# Altium PCB pcb.PcbDoc (part 1 of 2)
Units mm, origin at the board's own origin, x right, y up, seen from the top; angles counter-clockwise.
Board outline 78.1 x 58.42 mm, 2 copper layers (Top Layer, Bottom Layer); 90 components, 71 nets, 303 pads, 67 vias.
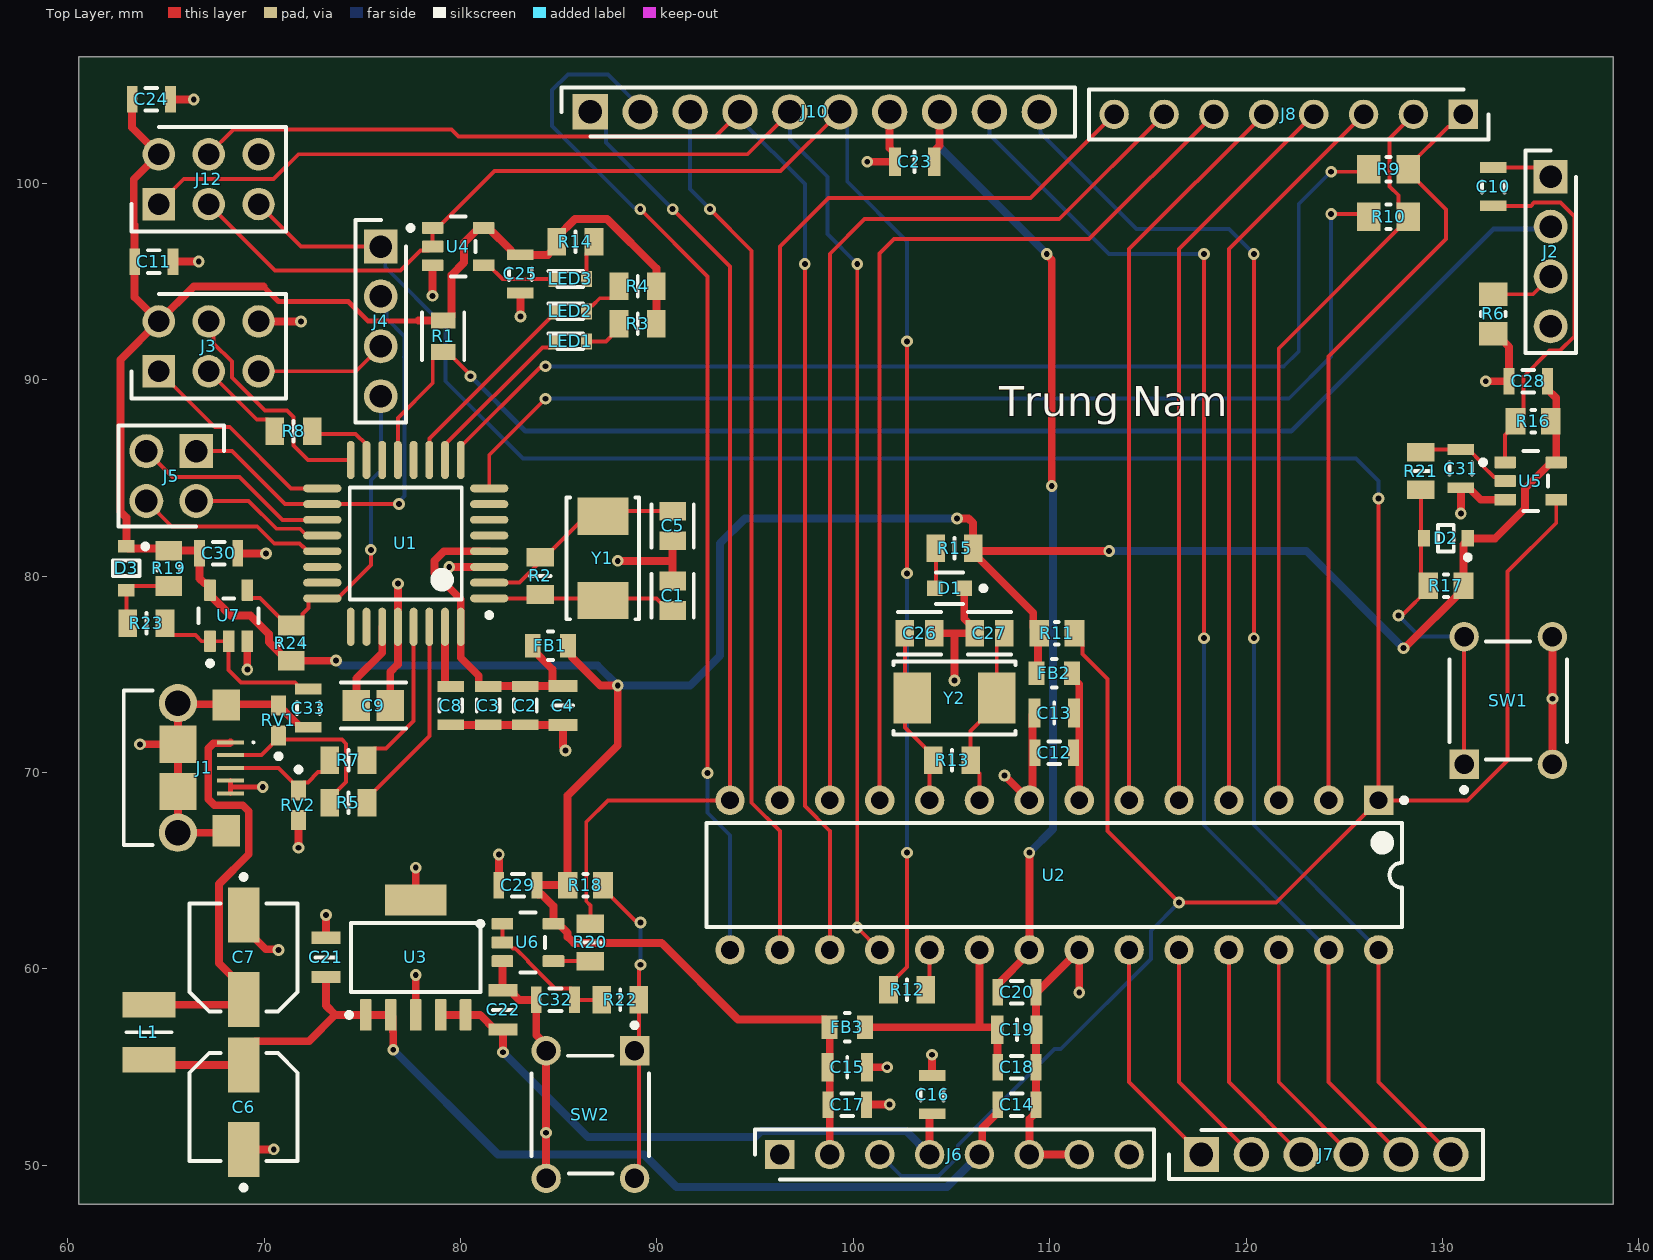
[diagram p0: Top Layer view]
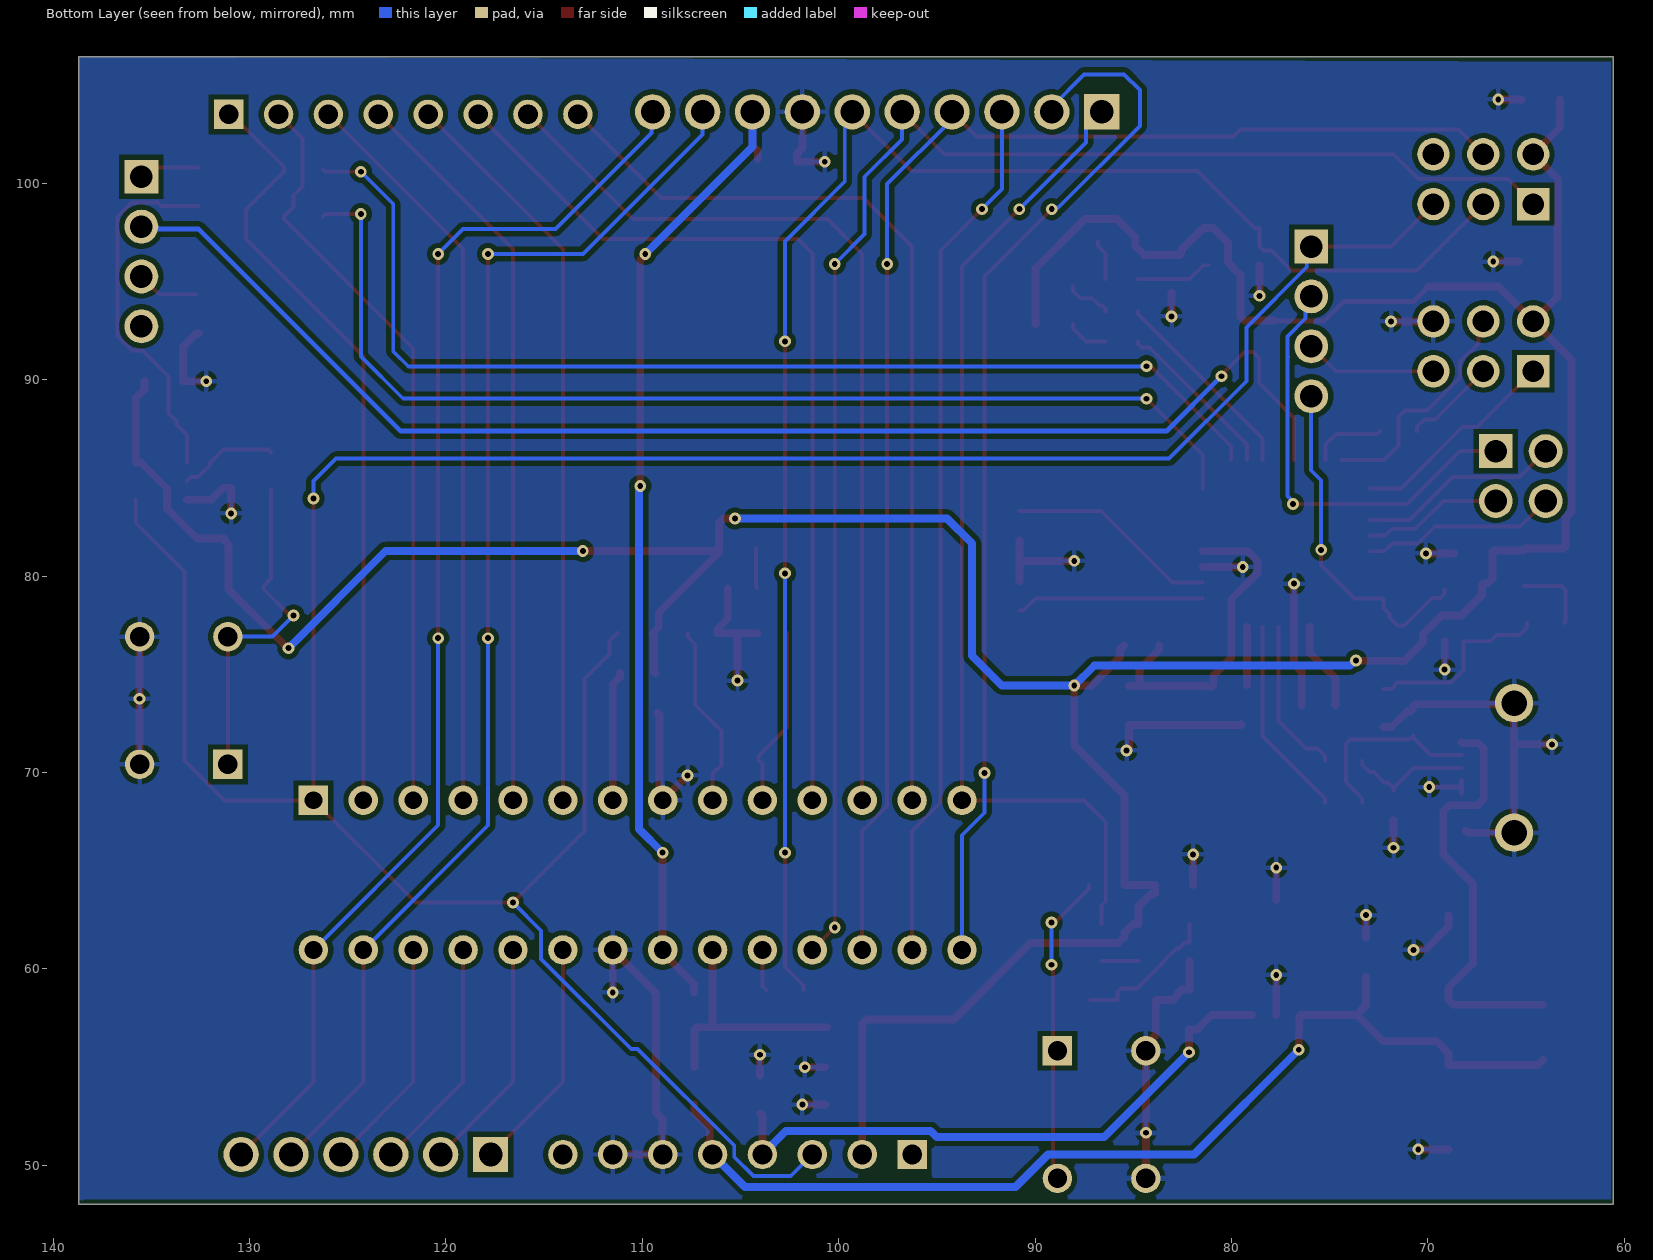
[diagram p1: Bottom Layer view, seen from below]
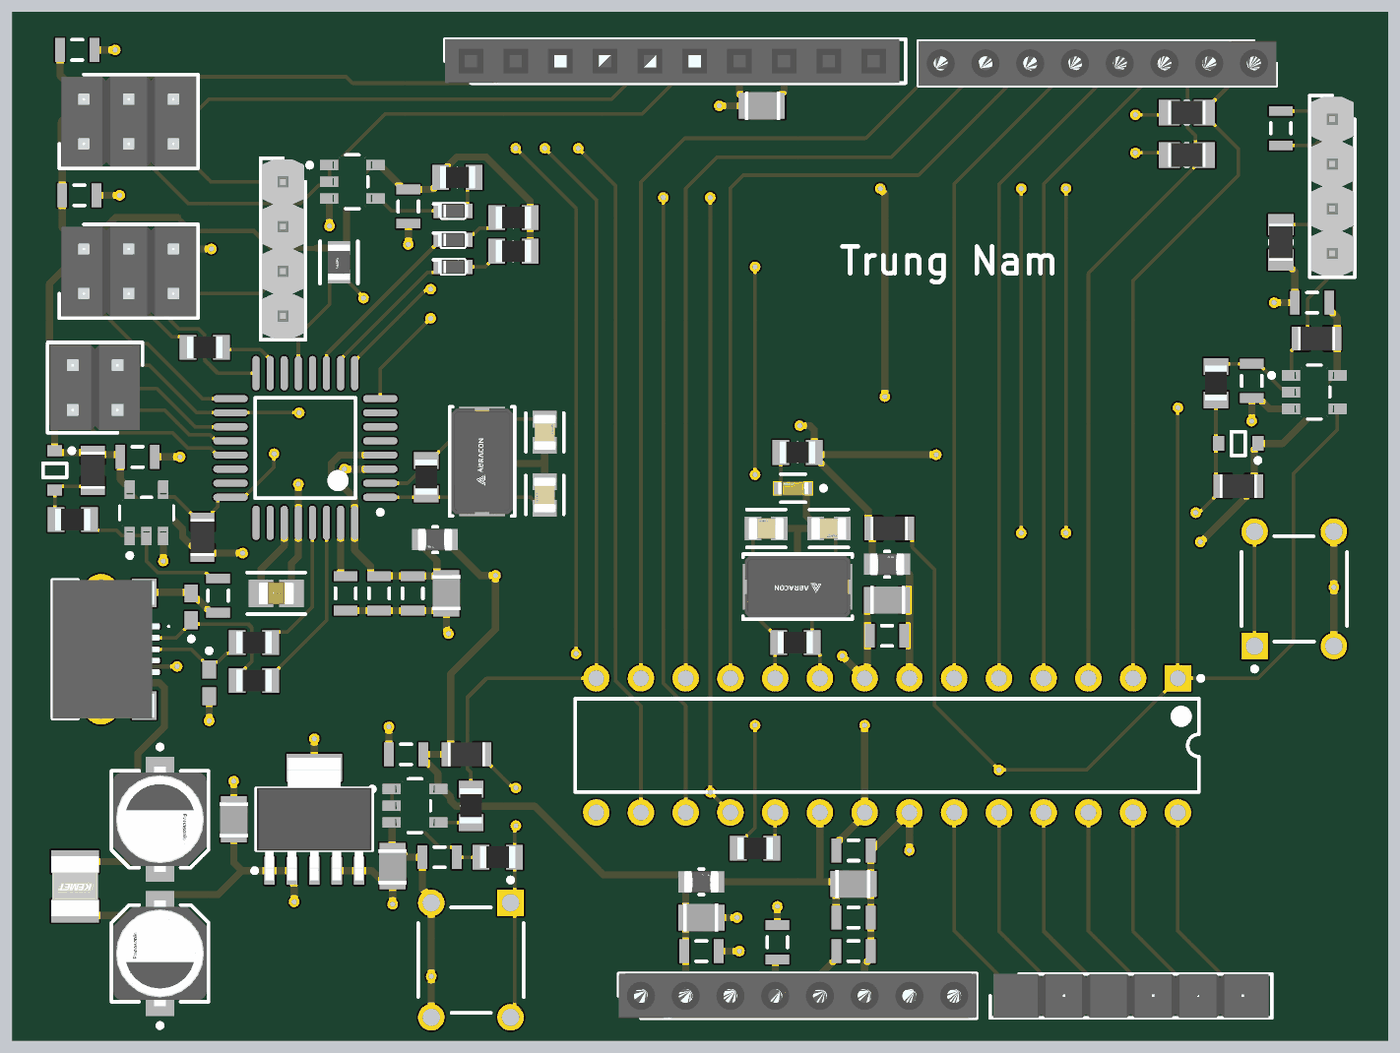
[diagram p2: 3D render of the assembled board from above, using the file's embedded part models]

## Layer stack, top to bottom
Top Solder: solder mask 0.0102, Solder Resist, Dk 3.5
Top Layer: signal copper 0.0356
Dielectric 1: dielectric 0.32, FR-4, Dk 4.8
Bottom Layer: signal copper 0.0356
Bottom Solder: solder mask 0.0102, Solder Resist, Dk 3.5

## Board outline
60.579,48.006 60.579,106.426 138.684,106.426 138.684,48.006

## Design rules (kind name [scope] priority, off if disabled: settings)
Clearance [All] p1: gap=0.254 ignorepadtopadclearanceinfootprint=FALSE
MinimumSolderMaskSliver [All] p1: minsoldermaskwidth=0.196
PolygonConnect [All] p1: connectstyle=Relief reliefconductorwidth=0.254 reliefentries=4 polygonreliefangle="90 Angle" airgapwidth=0.254
RoutingVias [All] p1: holewidth=0.2 width=0.4 viastyle="Through Hole" minholewidth=0.3 minwidth=0.6 maxholewidth=0.3 maxwidth=0.6
SilkToSolderMaskClearance [IsPad] p1: minsilkscreentomaskgap=0.2 clearancetoexposedcopper=TRUE
SolderMaskExpansion [All] p1: expansion=0.102 istentingtop=FALSE
SupplyNets "Schematic Supply Nets_5" [InNet('+5V/3V3')] p1: voltage=0.000
SupplyNets "Schematic Supply Nets_4" [InNet('+AREF')] p2: voltage=0.000
SupplyNets "Schematic Supply Nets_3" [InNet('GND')] p3: voltage=0.000
SupplyNets "Schematic Supply Nets_2" [InNet('+5')] p4: voltage=0.000
SupplyNets "Schematic Supply Nets_1" [InNet('+5V')] p5: voltage=0.000
SupplyNets "Schematic Supply Nets" [InNet('+3V3')] p6: voltage=0.000
Width [All] p1: maxlimit=0.4 minlimit=0.2 preferedwidth=0.254
28 further rules are at their usual default settings.

## Components (designator, comment, footprint, x,y, rotation, side; value= is the part's Value field where it differs from the comment)
C1 "18p" FP-C0805C-DN-MFG 90.805,78.994 r90 top value="18 pF"
C2 "100n" CAPC2013X145X20LL20 83.312,73.406 r90 top
C3 "100n" CAPC2013X145X20LL20 81.407,73.406 r90 top
C4 "10uF/16V" CAPC2012X145N 85.217,73.406 r90 top
C5 "18p" FP-C0805C-DN-MFG 90.805,82.55 r270 top value="18 pF"
C6 "100u/10V" FP-SC-MFG 68.961,52.959 r90 top
C7 "100u/10V" FP-SC-MFG 68.961,60.579 r270 top
C8 "100n" CAPC2013X145X20LL20 79.502,73.406 r90 top
C9 "1u" FP-C2012-125-0_2-IPC_A 75.565,73.406 r0 top
C10 "100n" CAPC2013X145X20LL20 132.588,99.822 r270 top
C11 "100n" CAPC2013X145X20LL20 64.389,96.012 r180 top
C12 "100n" CAPC2013X145X20LL20 110.236,70.993 r0 top
C13 "10uF/16V" CAPC2012X145N 110.236,73.025 r0 top
C14 "100n" CAPC2013X145X20LL20 108.331,53.086 r180 top
C15 "10uF/16V" CAPC2012X145N 99.695,54.991 r180 top
C16 "100n" CAPC2013X145X20LL20 104.013,53.594 r270 top
C17 "100n" CAPC2013X145X20LL20 99.695,53.086 r180 top
C18 "100n" CAPC2013X145X20LL20 108.331,54.991 r180 top
C19 "10uF/16V" CAPC2012X145N 108.331,56.896 r180 top
C20 "100n" CAPC2013X145X20LL20 108.331,58.801 r180 top
C21 "10uF/16V" CAPC2012X145N 73.152,60.579 r270 top
C22 "10uF/16V" CAPC2012X145N 82.169,57.912 r270 top
C23 "10uF/16V" CAPC2012X145N 103.124,101.092 r0 top
C24 "100n" CAPC2013X145X20LL20 64.262,104.267 r180 top
C25 "100n" CAPC2013X145X20LL20 83.058,95.377 r90 top
C26 "18p" FP-C0805C-DN-MFG 103.378,77.089 r0 top value="18 pF"
C27 "18p" FP-C0805C-DN-MFG 106.934,77.089 r180 top value="18 pF"
C28 "100n" CAPC2013X145X20LL20 134.366,89.916 r0 top
C29 "100n" CAPC2013X145X20LL20 82.931,64.262 r0 top
C30 "100n" CAPC2013X145X20LL20 67.691,81.153 r180 top
C31 "100n" CAPC2013X145X20LL20 130.937,85.471 r90 top
C32 "100n" CAPC2013X145X20LL20 84.836,58.42 r0 top
C33 "100n" CAPC2013X145X20LL20 72.263,73.279 r90 top
D1 "Green" FP-LG_L29K-MFG 104.902,79.375 r180 top
D2 "BAT54HT1G" ONSC-SOD-323-2-477-02_V 130.175,81.915 r180 top
D3 "BAT54HT1G" ONSC-SOD-323-2-477-02_V 62.992,80.391 r270 top
FB1 "MPZ2012S601AT000" FP-MPZ2012-MFG 84.582,76.454 r180 top
FB2 "MPZ2012S601AT000" FP-MPZ2012-MFG 110.236,75.057 r0 top
FB3 "MPZ2012S601AT000" FP-MPZ2012-MFG 99.695,57.023 r0 top
J1 "10118193-0001LF" 101181930001LF 65.913,70.231 r270 top
J2 "68001-204HLF" HDRV4W67P0X254_1X4_1016X241X858P 135.509,100.33 r270 top
J3 "A2541WV-2x3P-C808D808-G15" HDRV6W64P254_2X3_762X508X533P 64.643,90.424 r0 top
J4 "68001-204HLF" HDRV4W67P0X254_1X4_1016X241X858P 75.946,96.774 r270 top
J5 "68602-204HLF" HDRV4W67P254_2X2_508X483X888P 66.548,86.36 r180 top
J6 "M20-7820842" RHDR8W80P0X254_1X8_2032X254X850P 96.266,50.546 r0 top
J7 "M20-7820646" HDRV6W70P0X254_1X6_1564X250X865P 117.729,50.546 r0 top
J8 "M20-7820842" RHDR8W80P0X254_1X8_2032X254X850P 131.064,103.505 r180 top
J10 "M20-7821046" RHDR10W70P0X254_1X10_2580X250X865P 86.614,103.632 r0 top
J12 "A2541WV-2x3P-C808D808-G15" HDRV6W64P254_2X3_762X508X533P 64.643,98.933 r0 top
L1 "2u2/2A" INDC3225X270N 64.135,56.769 r90 top
LED1 "Orange" SODFL1708X67N 85.598,91.948 r0 top
LED2 "Orange" SODFL1708X67N 85.598,93.472 r0 top
LED3 "Orange" SODFL1708X67N 85.598,95.123 r0 top
R1 "100k" FP-RC0805-0_6-IPC_C 79.121,92.202 r90 top
R2 "1M" RESC2012X60N 84.074,80.01 r90 top
R3 "560R" RESC2012X60N 89.027,92.837 r0 top
R4 "560R" RESC2012X60N 89.027,94.742 r0 top
R5 "22R" RESC2012X60N 74.295,68.453 r0 top
R6 "1k" RESC2013X60X35ML10T20 132.588,93.345 r270 top
R7 "22R" RESC2012X60N 74.295,70.612 r0 top
R8 "22R" RESC2012X60N 71.501,87.376 r180 top
R9 "1k" RESC2013X60X35ML10T20 127.254,100.711 r180 top
R10 "1k" RESC2013X60X35ML10T20 127.254,98.298 r180 top
R11 "10k" RESC2013X60X35NL10T20 110.363,77.089 r180 top
R12 "22R" RESC2012X60N 102.743,58.928 r180 top
R13 "1M" RESC2012X60N 105.029,70.612 r180 top
R14 "560R" RESC2012X60N 85.852,97.028 r180 top
R15 "560R" RESC2012X60N 105.156,81.407 r0 top
R16 "10K" RESC2013X60X35NL10T20 134.62,87.884 r0 top
R17 "10K" RESC2013X60X35NL10T20 130.175,79.502 r0 top
R18 "10K" RESC2013X60X35NL10T20 86.36,64.262 r180 top
R19 "10K" RESC2013X60X35NL10T20 65.151,80.391 r90 top
R20 "560R" RESC2012X60N 86.614,61.341 r270 top
R21 "22R" RESC2012X60N 128.905,85.344 r90 top
R22 "22R" RESC2012X60N 88.138,58.42 r180 top
R23 "22R" RESC2012X60N 64.008,77.597 r0 top
R24 "10K" RESC2013X60X35NL10T20 71.374,76.581 r270 top
RV1 "CG0603MLC-05E" BOUR-CG0603-2_V 70.739,72.644 r90 top
RV2 "CG0603MLC-05E" BOUR-CG0603-2_V 71.755,68.326 r270 top
SW1 "1825910-6" TECO-1825910-6_V 133.35,73.66 r90 top
SW2 "1825910-6" TECO-1825910-6_V 86.614,52.578 r270 top
U1 "ATmega16U2-AU" 32A_M 77.216,81.661 r180 top
U2 "ATmega328P-PU" 28P3 110.236,64.77 r270 top
U3 "TL1963A-33DCQR" DCQ0006A_L 77.724,60.579 r90 top
U4 "SN74AHC1G09DBVR" FP-DBV0005A-MFG 79.883,96.774 r0 top
U5 "SN74AHC1G09DBVR" FP-DBV0005A-MFG 134.493,84.836 r0 top
U6 "SN74AHC1G09DBVR" FP-DBV0005A-MFG 83.439,61.341 r0 top
U7 "SN74AHC1G09DBVR" FP-DBV0005A-MFG 68.199,77.978 r90 top
Y1 "ABM7-16.000MHZ-D2Y-T" FP-ABM7-MFG 87.249,80.899 r90 top
Y2 "ABM7-16.000MHZ-D2Y-T" FP-ABM7-MFG 105.156,73.787 r180 top

## Footprints (in the part's own frame and the unit in brackets; to place one, negate y for a bottom-side part, rotate by r counter-clockwise, add the part's x,y. Pads: shape width x height; smd on the part's side, far side on the other; paste and mask are expansions set on the pad)
28P3 [mm] "28-Pin Plastic Dual In-Line Package (PDIP)"
  rect 1.5x1.5 hole 0.9: 1(-3.81,16.51)
  round 1.5 hole 0.9: 2(-3.81,13.97) 3(-3.81,11.43) 4(-3.81,8.89) 5(-3.81,6.35) 6(-3.81,3.81) 7(-3.81,1.27) 8(-3.81,-1.27) 9(-3.81,-3.81) 10(-3.81,-6.35) 11(-3.81,-8.89) 12(-3.81,-11.43) 13(-3.81,-13.97) 14(-3.81,-16.51) 15(3.81,-16.51) 16(3.81,-13.97) 17(3.81,-11.43) 18(3.81,-8.89) 19(3.81,-6.35) 20(3.81,-3.81) 21(3.81,-1.27) 22(3.81,1.27) 23(3.81,3.81) 24(3.81,6.35) 25(3.81,8.89) 26(3.81,11.43) 27(3.81,13.97) 28(3.81,16.51)
  silkscreen extent -3.93,-17.7 2.65,17.94, body extent -3.6,-17.65 3.6,17.65, height 4.58
32A_M [mm] "Thin QFP, 32-Leads, Body 7x7mm, Pitch 0.8mm, IPC Low Density"
  oval 1.95x0.4 smd: 1(-4.25,2.8) 2(-4.25,2) 3(-4.25,1.2) 4(-4.25,0.4) 5(-4.25,-0.4) 6(-4.25,-1.2) 7(-4.25,-2) 8(-4.25,-2.8) 17(4.25,-2.8) 18(4.25,-2) 19(4.25,-1.2) 20(4.25,-0.4) 21(4.25,0.4) 22(4.25,1.2) 23(4.25,2) 24(4.25,2.8)
  oval 0.4x1.95 smd: 9(-2.8,-4.25) 10(-2,-4.25) 11(-1.2,-4.25) 12(-0.4,-4.25) 13(0.4,-4.25) 14(1.2,-4.25) 15(2,-4.25) 16(2.8,-4.25) 25(2.8,4.25) 26(2,4.25) 27(1.2,4.25) 28(0.4,4.25) 29(-0.4,4.25) 30(-1.2,4.25) 31(-2,4.25) 32(-2.8,4.25)
  silkscreen extent -4.38,-2.85 2.85,3.77, body extent -3.5,-3.5 3.5,3.5, height 1.2
101181930001LF [mm]
  rect 0.2x1.35 smd: 1(-1.3,2.38) 2(-0.65,2.38) 3(0,2.38) 4(0.65,2.38) 5(1.3,2.38)
  round 1.95 hole 1.3: MH1(-3.3,-0.295) MH2(3.3,-0.295)
  rect 1.6x1.4 smd: MP1(-3.2,2.155) MP2(3.2,2.155)
  rect 1.9x1.9 smd: MP3(-1.2,-0.295) MP4(1.2,-0.295)
  silkscreen extent -3.93,-3.06 3.93,3.6, body extent -3.93,-3.06 3.93,3.02, height 3.4
BOUR-CG0603-2_V [mm] "SMD, 2-Leads, Body 1.6x0.8mm, Pitch 1.52mm"
  rect 1.02x0.76 smd: 1(-0.76,0) 2(0.76,0)
  silkscreen extent -1.94,-0.13 -1.7,0.12, body extent -0.8,-0.4 0.8,0.4, height 0.55
CAPC2012X145N [mm]
  rect 0.62x1.47 smd: 1(-1,0) 2(1,0)
  silkscreen extent 0,-0.53 0,0.53, body extent -0.96,-0.8 1.04,0.8, height 1.25
CAPC2013X145X20LL20 [mm] "Chip Capacitor, 2-Leads, Body 2.20x1.45mm, IPC High Density"
  rect 0.55x1.35 smd: 1(-0.975,0) 2(0.975,0)
  silkscreen extent -0.3,-0.58 0.3,0.58, body extent -1.1,-0.72 1.1,0.72, height 1.45
DCQ0006A_L [mm] "SOT223, 6-Leads, Body 6.55x3.55mm, Pitch 1.27mm, IPC High Density"
  rrect17% 1.6x0.6 smd: 1(-2.925,2.54) 2(-2.925,1.27) 3(-2.925,0) 4(-2.925,-1.27) 5(-2.925,-2.54)
  rrect6% 1.6x3.15 smd: 6(2.925,0)
  silkscreen extent -3.05,-3.3 1.75,3.51, body extent -3.48,-3.25 3.48,3.25, height 1.64
FP-ABM7-MFG [mm]
  rect 1.9x2.6 smd paste+0 mask+0: 1(-2.15,0) 2(2.15,0)
  silkscreen extent -3.1,-1.85 3.1,1.85, body extent -3.2,-1.95 3.2,1.95, height 0.25
FP-C0805C-DN-MFG [mm]
  rect 0.95x1.35 smd paste+0 mask+0: 1(-0.75,0) 2(0.75,0)
  silkscreen extent -1.1,-1.07 1.1,1.07, body extent -1.4,-0.85 1.4,0.85, height 0.25
FP-C2012-125-0_2-IPC_A [mm]
  rect 1.4x1.556 smd paste+0 mask+0: 1(-0.864,0) 2(0.864,0)
  silkscreen extent -1.65,-1.18 1.65,1.18, body extent -2.15,-1.28 2.15,1.28, height 0.25
FP-DBV0005A-MFG [mm]
  rrect17% 1.1x0.6 smd paste+0 mask+0: 1(-1.3,0.95) 2(-1.3,0) 3(-1.3,-0.95) 4(1.3,-0.95) 5(1.3,0.95)
  silkscreen extent -2.55,-1.53 0.87,1.52, body extent -1.95,-1.78 1.95,1.78, height 0.25
FP-LG_L29K-MFG [mm]
  rect 0.8x0.8 smd paste-1000 mask+0: 1(-0.75,0) 2(0.75,0)
  silkscreen extent -1.85,-0.8 0.7,0.8, body extent -1.25,-0.55 1.25,0.55, height 0.25
FP-MPZ2012-MFG [mm]
  rect 0.8x1.2 smd paste+0 mask+0: 1(-0.9,0) 2(0.9,0)
  silkscreen extent -0.13,-0.72 0.13,0.72, body extent -1.4,-0.82 1.4,0.82, height 0.25
FP-RC0805-0_6-IPC_C [mm]
  rect 0.808x1.262 smd paste+0 mask+0: 1(-0.802,0) 2(0.802,0)
  silkscreen extent -1.21,-1.07 1.21,1.07, body extent -1.31,-0.77 1.31,0.77, height 0.25
FP-SC-MFG [mm]
  rect 2.8x1.6 smd paste+0 mask+0: 1(-2.15,0) 2(2.15,0)
  silkscreen extent -4.22,-2.75 2.75,2.75, body extent -3.8,-3 3.8,3, height 0.25
HDRV4W67P0X254_1X4_1016X241X858P [mm]
  rect 1.725x1.725 hole 1.15: 1(0,0)
  round 1.725 hole 1.15: 2(2.54,0) 3(5.08,0) 4(7.62,0)
  silkscreen extent -1.35,-1.28 8.97,1.28, body extent -1.27,-1.21 8.89,1.21, height 8.38
HDRV4W67P254_2X2_508X483X888P [mm]
  rect 1.725x1.725 hole 1.15: 1(0,0)
  round 1.725 hole 1.15: 2(0,2.54) 3(2.54,0) 4(2.54,2.54)
  silkscreen extent -1.42,-1.3 3.96,3.84, body extent -1.27,-1.14 3.81,3.68, height 8.88
HDRV6W64P254_2X3_762X508X533P [mm]
  rect 1.65x1.65 hole 1.1: 1(0,0)
  round 1.65 hole 1.1: 2(0,2.54) 3(2.54,0) 4(2.54,2.54) 5(5.08,0) 6(5.08,2.54)
  silkscreen extent -1.4,-1.4 6.48,3.94, body extent -1.27,-1.27 6.35,3.81, height 5.33
HDRV6W70P0X254_1X6_1564X250X865P [mm]
  rect 1.8x1.8 hole 1.2: 1(0,0)
  round 1.8 hole 1.2: 2(2.54,0) 3(5.08,0) 4(7.62,0) 5(10.16,0) 6(12.7,0)
  silkscreen extent -1.65,-1.25 14.35,1.25, body extent -1.47,-1.25 14.17,1.25, height 8.65
INDC3225X270N [mm]
  rect 1.3x2.7 smd: 1(-1.4,0) 2(1.4,0)
  silkscreen extent 0,-1.15 0,1.15, body extent -1.7,-1.35 1.7,1.35, height 2.7
ONSC-SOD-323-2-477-02_V [mm] "SOD, 2-Leads, Body 1.7x1.25mm"
  rect 0.63x0.83 smd: 1(-1.115,0) 2(1.115,0)
  silkscreen extent -1.24,-0.67 0.4,1.09, body extent -0.85,-0.63 0.85,0.63, height 1.06
RESC2012X60N [mm]
  rect 0.95x1.4 smd: 1(-0.95,0) 2(0.95,0)
  silkscreen extent 0,-0.53 0,0.53, body extent -1,-0.63 1,0.63, height 0.6
RESC2013X60X35ML10T20 [mm] "Chip Resistor, 2-Leads, Body 2.1x1.35mm, IPC Low Density"
  rect 1.2x1.45 smd: 1(-1,0) 2(1,0)
  silkscreen extent -0.1,-0.63 0.1,0.63, body extent -1.05,-0.68 1.05,0.67, height 0.6
RESC2013X60X35NL10T20 [mm] "Chip Resistor, 2-Leads, Body 2.1x1.35mm, IPC Medium Density"
  rect 1x1.35 smd: 1(-0.9,0) 2(0.9,0)
  silkscreen extent -0.1,-0.58 0.1,0.58, body extent -1.05,-0.68 1.05,0.67, height 0.6
RHDR8W80P0X254_1X8_2032X254X850P [mm]
  rect 1.5x1.5 hole 1: 1(0,0)
  round 1.5 hole 1: 2(2.54,0) 3(5.08,0) 4(7.62,0) 5(10.16,0) 6(12.7,0) 7(15.24,0) 8(17.78,0)
  silkscreen extent -1.27,-1.27 19.05,1.27, body extent -1.27,-1.27 19.05,1.27, height 8.5
RHDR10W70P0X254_1X10_2580X250X865P [mm]
  rect 1.8x1.8 hole 1.2: 1(0,0)
  round 1.8 hole 1.2: 2(2.54,0) 3(5.08,0) 4(7.62,0) 5(10.16,0) 6(12.7,0) 7(15.24,0) 8(17.78,0) 9(20.32,0) 10(22.86,0)
  silkscreen extent -1.47,-1.25 24.68,1.25, body extent -1.47,-1.25 24.33,1.25, height 8.65
SODFL1708X67N [mm]
  rect 0.57x0.82 smd: 1(-0.825,0) 2(0.825,0)
  silkscreen extent -1.11,-0.4 0.65,0.4, body extent -0.85,-0.4 0.85,0.4, height 0.67
TECO-1825910-6_V [mm] "Switch, 4-Leads, Body 5.99x5.99mm"
  rect 1.5x1.5 hole 0.99: 1(-3.25,2.25)
  round 1.5 hole 0.99: 2(3.25,2.25) 3(-3.25,-2.25) 4(3.25,-2.25)
  silkscreen extent -4.67,-2.99 2.99,3, body extent -3,-2.99 2.99,3, height 5

## Part data
C1 C5 C26 C27: library part CMP-2007-00302-2, "CAP CER 18PF 50V C0G/NP0 0805", Capacitance="18 pF", Manufacturer=KEMET, Manufacturer Part Number=C0805C180J5GACTU, Package=C0805C-DN, Temperature="-55°C to +125°C", Temperature Characteristic=C0G, Temperature Coefficient=30ppm/°C, Temperature Range High=+125°C, Temperature Range Low=-55°C, Tolerance=0.05, Voltage Rating="50 V", Automotive=No, Category=Cap, ComponentLink2Description=Datasheet, ComponentLink2URL=https://content.kemet.com/datasheets/KEM_C1003_C0G_SMD.pdf, Device Class L1="Passive Components", Device Class L2=Capacitors, Device Class L3="Ceramic Capacitors", Digikey Description="CAP CER 18PF 50V C0G/NP0 0805", Height=0.88mm, Ipc Land Pattern Name=CAPC200125X78, Lead Free=Yes, Material=Ceramic, Mouser Description="Cap Ceramic 18pF 50V C0G 5% SMD 0805 125C Paper T/R", Octopart=https://octopart.com/c0805c180j5gactu-kemet-144810, RoHS=TRUE
C2 C3 C8 C10 C11 C12 C14 C16 C17 C18 C20 C24 C25 C28 C29 C30 C31 C32 C33: library part CMP-2000-07557-1, "Chip Capacitor, 0.1 uF, +/- 10%, 50 V, -55 to 125 degC, 0805 (2012 Metric), RoHS, Tape and Reel", Capacitance=100nF, Case Code (Imperial)=0805, Case Code (Metric)=2012, Dielectric=X7R, Dielectric Material=Ceramic, Manufacturer=TDK, Max Operating Temperature=125degC, Min Operating Temperature=-55degC, Package Description="2-Pin Surface Mount Device, Body 2 x 1.25 mm", Package Quantity=1, Package Reference=805, Tolerance=10%, Voltage=50V, Case/Package=0805, Composition=Ceramic, Datasheet URL=https://product.tdk.com/info/en/catalog/datasheets/mlcc_commercial_general_en.pdf, Datasheet Version=07/2017, Depth=1.25mm, Height=0.85mm, Lead Free=LeadFree, Length=2mm, Manufacturer URL=http://www.tdk.com/, Mount=SurfaceMount, Mounting Technology=SurfaceMount, Number of Pins=2, Packaging=TapeandReel, Radiation Hardening=No, REACH SVHC=NoSVHC, RoHSCompliant=True, Termination=SMD/SMT, Thickness=0.037inch, Voltage Rating=50V, Voltage Rating (DC)=50V, Weight=0.000194oz, Width=0.049inch
C4 C13 C15 C19 C21 C22 C23: library part C2012X5R1C106M125AC, "Capacitor", Manufacturer_Name=TDK, Mouser Part Number=810-C2012X5R1C106M-3, Datasheet Link=https://product.tdk.com/info/en/catalog/datasheets/mlcc_commercial_midvoltage_en.pdf, Height=1.45mm, Manufacturer_Part_Number=C2012X5R1C106M125AC, Mouser Price/Stock=https://www.mouser.co.uk/ProductDetail/TDK/C2012X5R1C106M125AC?qs=LcTL%2F5vFEzHcq9TBdtOIgw%3D%3D
C6 C7: library part CMP-05427-000047-1, "CAP ALUM 100UF 20% 10V SMD", Capacitance=100uF, Case/Package=Radial, Max Operating Temperature=85°C, Min Operating Temperature=-40°C, Package Quantity=1, Ripple Current=50mA, Tolerance=20%, Voltage Rating=10V, Construction=Cylindrical, Contact Plating=Tin, Diameter=5mm, Height=5.4mm, Height - Seated (Max)=0.213inch, Lead Free="Lead Free", Length=5.5mm, Life (Hours)=1000Hour, Mount="Surface Mount", Packaging="Tape and Reel", Radiation Hardening=No, Ripple Current (AC)=50mA, RoHS Compliant=Yes, Series=S, Termination=SMD/SMT, Voltage Rating (DC)=10V
C9: library part CMP-08246-005389-1, "Multilayer Ceramic Capacitors 1μF ±10% 25V X5R SMD 0805", Capacitance=1uF, Case Code (Imperial)=0805, Case Code (Metric)=2012, Dielectric=X5R, Dielectric Material=Ceramic, Max Operating Temperature=85°C, Min Operating Temperature=-55°C, Package Quantity=2000, Tolerance=10%, Voltage=25V, Case/Package=0805, Construction=Flat, Depth=1.25mm, Height=1.25mm, Lead Free="Lead Free", Length=2mm, Mount="Surface Mount", Number of Pins=2, Packaging="Tape and Reel", Radiation Hardening=No, REACH SVHC="No SVHC", Resistor Type=Ceramic, RoHS Compliant=Yes, Series=C, Termination=SMD/SMT, Thickness=0.057inch, Voltage Rating=25V, Voltage Rating (DC)=25V, Weight=0.000194oz, Width=0.049inch
D1: library part CMP-62016-000024-1, "LED GREEN DIFFUSED 0603 SMD", Case Code (Imperial)=0603, Case Code (Metric)=1608, Forward Current=20mA, Forward Voltage=2.2V, Lens Color=White, Max Operating Temperature=100°C, Min Operating Temperature=-40°C, Package Quantity=5000, Reverse Voltage=12V, Test Current=2mA, Case/Package=0603, Color=Green, Depth=0.8mm, Dominant Wavelength=570nm, Height=0.65mm, Illumination Color=Green, Length=1.3mm, Lens Size=0.8mm, Lens Style=Flat, Lens Transparency=Diffused, Luminous Flux=0.012lm, Luminous Intensity=5.6mcd, Mount="Surface Mount", Number of Elements=1, Number of LEDs=1, Number of Pins=2, Packaging="Tape and Reel", Radiation Hardening=No, Viewing Angle=160°, Width=0.8mm
D2 D3: library part CMP-1055-00462-1, "Schottky Barrier Diode, 2-Pin SOD-323, Pb-Free, Tape and Reel", Manufacturer="On Semiconductor", ComponentLink1Description="Manufacturer URL", ComponentLink1URL=http://www.onsemi.com/, ComponentLink2Description=Datasheet, ComponentLink2URL=http://www.onsemi.cn/pub_link/Collateral/BAT54HT1-D.PDF, ComponentLink3Description="Package Specification", ComponentLink3URL=http://www.onsemi.com/pub_link/Collateral/477-02.PDF.1, Configuration=Single, DatasheetVersion="Rev. 6", IFSM Max (A)=0.6, Mounting Technology="Surface Mount", PackageDescription="2-Pin SOD, Body 1.7 x 1.25 mm", PackageReference=SOD-323-2-477-02, PackageVersion="Rev. H, 03/2007", Packing="Tape and Reel", PartNumber=BAT54HT1G, RoHS=TRUE, trr Max (ns)=5
FB1 FB2 FB3: library part CMP-2000-05401-2, Case Code (Imperial)=0805, Case Code (Metric)=2012, Current Rating=2A, DC Resistance (DCR)=100mΩ, Manufacturer Lifecycle Status=PRODUCTION, Max Operating Temperature=125°C, Min Operating Temperature=-55°C, Test Frequency=100MHz, Tolerance=25%, Case/Package=0805, Core Material=Ferrite, Height=1.0414mm, Impedance=600Ω, Lead Free="Lead Free", Length=2mm, Lifecycle Status=Production, Max DC Current=2A, Max Length=2.2mm, Max Width=1.45mm, Min Length=1.8mm, Min Width=1.05mm, Mount="Surface Mount", NexarPartId=12090955, Packaging=Digi-Reel®, REACH SVHC="No SVHC", Resistance=100mΩ, RMS Current (Irms)=2A, RoHS=Compliant, Schedule B="8504500000, 8504500000", Series Resistance=100mΩ, Width=1.25mm
J1 J2 J4: "Connector", Manufacturer_Name="Amphenol Communications Solutions"
  J1: Arrow Part Number=10118193-0001LF, Arrow Price/Stock=https://www.arrow.com/en/products/10118193-0001lf/amphenol-fci?utm_currency=USD&region=europe, Datasheet Link=https://cdn.amphenol-cs.com/media/wysiwyg/files/drawing/10118193.pdf, Height=3.3mm, Manufacturer_Part_Number=10118193-0001LF
  J2 J4: Datasheet Link=https://cdn.amphenol-cs.com/media/wysiwyg/files/drawing/68000.pdf, Height=8.58mm, Manufacturer_Part_Number=68001-204HLF
J3 J12: "Connector", Manufacturer_Name="Changjiang Connectors", Datasheet Link=https://www.cjt.com/Upload/A2541.pdf, Height=5.33mm, Manufacturer_Part_Number=A2541WV-2x3P-C808D808-G15
J5: "Connector", Manufacturer_Name=Amphenol, Mouser Part Number=649-68602-204HLF, Arrow Part Number=68602-204HLF, Arrow Price/Stock=https://www.arrow.com/en/products/68602-204hlf/amphenol-fci?region=nac, Datasheet Link=https://cdn.amphenol-icc.com/media/wysiwyg/files/drawing/67996.pdf, Height=8.88mm, Manufacturer_Part_Number=68602-204HLF, Mouser Price/Stock=https://www.mouser.co.uk/ProductDetail/Amphenol-FCI/68602-204HLF?qs=CEgdKq8q45VwVPnJk6o7tQ%3D%3D
J6 J8: "Connector", Manufacturer_Name=Harwin, Mouser Part Number=855-M20-7820842, Datasheet Link=https://cdn.harwin.com/pdfs/M20-782.pdf, Height=8.5mm, Manufacturer_Part_Number=M20-7820842, Mouser Price/Stock=https://www.mouser.co.uk/ProductDetail/Harwin/M20-7820842?qs=WS5Jv%252B%252Bx1qXOep0XOTvy2Q%3D%3D
J7: "Connector", Manufacturer_Name=Harwin, Mouser Part Number=855-M20-7820646, Datasheet Link=https://cdn.harwin.com/pdfs/M20-782.pdf, Height=8.65mm, Manufacturer_Part_Number=M20-7820646, Mouser Price/Stock=https://www.mouser.co.uk/ProductDetail/Harwin/M20-7820646?qs=WS5Jv%252B%252Bx1qWZs4rbTjPGWw%3D%3D
J10: "Connector", Manufacturer_Name=Harwin, Mouser Part Number=855-M20-7821046, Datasheet Link=https://cdn.harwin.com/pdfs/M20-782.pdf, Height=8.65mm, Manufacturer_Part_Number=M20-7821046, Mouser Price/Stock=https://www.mouser.co.uk/ProductDetail/Harwin/M20-7821046?qs=Jph8NoUxIfXTsFl0wvOA6g%3D%3D
L1: library part L1210R2R2MDWIT, "Inductor", Manufacturer_Name=KEMET, Mouser Part Number=80-L1210R2R2MDWIT, Arrow Part Number=L1210R2R2MDWIT, Arrow Price/Stock=https://www.arrow.com/en/products/l1210r2r2mdwit/kemet-corporation?region=nac, Datasheet Link=https://content.kemet.com/datasheets/KEM_L9015_L-DWI.pdf, Height=2.7mm, Manufacturer_Part_Number=L1210R2R2MDWIT, Mouser Price/Stock=https://www.mouser.co.uk/ProductDetail/KEMET/L1210R2R2MDWIT?qs=v1sh8PPj49i7zaK1i33Fzg%3D%3D
LED1 LED2 LED3: library part LO_L29K-H2K1-24-Z, "LED", Arrow Part Number="LO L29K-H2K1-24-Z", Manufacturer_Name="ams OSRAM", Mouser Part Number=720-LOL29KH2K124Z, Arrow Price/Stock=https://www.arrow.com/en/products/lol29k-h2k1-24-z/osram-opto-semiconductors, Datasheet Link=https://datasheet.datasheetarchive.com/originals/distributors/DKDS41/DSANUWW0036666.pdf, Height=0.67mm, Manufacturer_Part_Number="LO L29K-H2K1-24-Z", Mouser Price/Stock=https://www.mouser.com/Search/Refine.aspx?Keyword=720-LOL29KH2K124Z
R1: library part CMP-2100-03668-5, "RES 100K OHM 1% 1/8W 0805", Case Code (Imperial)=0805, Case Code (Metric)=2012, Max Operating Temperature=155°C, Max Power Dissipation=125mW, Min Operating Temperature=-55°C, Package Quantity=1, Resistance=100kR, Resistance Tolerance=1%, Resistor Type="Thick Film", Temperature Coefficient=100ppm/°C, Voltage Rating=150V, Case/Package=0805, Construction=Rectangular, Depth=1.25mm, Features="Moisture Resistant", Height=0.024inch, Lead Free="Lead Free", Lead Pitch=0.4mm, Length=0.079inch, Military Standard=Not, Number of Pins=2, Number of Terminations=2, Packaging="Tape and Reel", Power Rating=125mW, RoHS Compliant=Yes, Series=RC, Size Code=0805, Technology="THICK FILM", Termination=SMD/SMT, Tolerance=1%, Voltage Rating (DC)=150V, Width=0.049inch
R2 R13: library part RC0805FR-071ML, "Resistor", Manufacturer_Name=KEMET, Mouser Part Number=603-RC0805FR-071ML, Arrow Part Number=RC0805FR-071ML, Arrow Price/Stock=https://www.arrow.com/en/products/rc0805fr-071ml/yageo?region=europe, Datasheet Link=http://www.yageo.com/documents/recent/PYu-RC_Group_51_RoHS_L_10.pdf, Height=0.6mm, Manufacturer_Part_Number=RC0805FR-071ML, Mouser Price/Stock=https://www.mouser.co.uk/ProductDetail/YAGEO/RC0805FR-071ML?qs=8Y8p%252BasKcI6wvSL4jxV1pQ%3D%3D
R3 R4 R14 R15 R20: library part RC0805FR-07560RL, "Resistor", Manufacturer_Name=KEMET, Mouser Part Number=603-RC0805FR-07560RL, Arrow Part Number=RC0805FR-07560RL, Arrow Price/Stock=https://www.arrow.com/en/products/rc0805fr-07560rl/yageo?region=nac, Datasheet Link=http://www.yageo.com/documents/recent/PYu-RC_Group_51_RoHS_L_10.pdf, Height=0.6mm, Manufacturer_Part_Number=RC0805FR-07560RL, Mouser Price/Stock=https://www.mouser.co.uk/ProductDetail/YAGEO/RC0805FR-07560RL?qs=g6xwsc4j%252B%2Foqaguphwrcog%3D%3D
R5 R7 R8 R12 R21 R22 R23: library part RC0805FR-0722RL, "Resistor", Manufacturer_Name=KEMET, Mouser Part Number=603-RC0805FR-0722RL, Arrow Part Number=RC0805FR-0722RL, Arrow Price/Stock=https://www.arrow.com/en/products/rc0805fr-0722rl/yageo, Datasheet Link=http://www.yageo.com/documents/recent/PYu-RC_Group_51_RoHS_L_10.pdf, Height=0.6mm, Manufacturer_Part_Number=RC0805FR-0722RL, Mouser Price/Stock=https://www.mouser.com/Search/Refine.aspx?Keyword=603-RC0805FR-0722RL
R6 R9 R10: library part CMP-2100-03671-1, "Chip Resistor, 1 KOhm, +/- 1%, 125 mW, -55 to 155 degC, 0805 (2012 Metric), RoHS, Tape and Reel", Case Code (Imperial)=0805, Case Code (Metric)=2012, Manufacturer=Yageo, Max Operating Temperature=155degC, Max Power Dissipation=125mW, Min Operating Temperature=-55degC, Package Description="2-Pin Surface Mounted Device, Body 2 x 1.25 mm", Package Quantity=1, Resistance=1KOhm, Temperature Coefficient=100ppm/degreesC, Tolerance=1%, Voltage Rating=150V, Case/Package=0805, Composition=ThickFilm, Datasheet URL=http://www.yageo.com/NewPortal/yageodocoutput?fileName=/pdf/R-Chip/PYu-RC_Group_51_RoHS_L_5.pdf, Datasheet Version="Rev. 5, 10/2016", Depth=1.25mm, Height=0.024inch, Lead Free=LeadFree, Length=0.079inch, Manufacturer URL=http://www.yageo.com/, Military Standard=Not, Number of Pins=2, Number of Terminations=2, Package Reference=0805, Packaging=TapeandReel, Power Rating=125mW, REACH SVHC=Unknown, RoHSCompliant=true, Termination=SMD/SMT, Voltage Rating (DC)=150V, Width=0.049inch
R11 R16 R17 R18 R19 R24: library part CMP-1659-00013-4, "Chip Resistor, 10 KOhm, +/- 1%, 0.125 W, -55 to 155 degC, 0805 (2012 Metric), RoHS, Tape and Reel", Manufacturer=Yageo, Max Operating Temperature="155 degC", Min Operating Temperature="-55 degC", Package Quantity=5000, Voltage Rating="150 V", ComponentLink1Description="Manufacturer URL", ComponentLink1URL=http://www.yageo.com/, ComponentLink2Description=Datasheet, ComponentLink2URL=http://www.yageo.com/documents/recent/PYu-RC_Group_51_RoHS_L_04.pdf, DatasheetVersion="Rev. 4, 02/2016", Height="0.5 mm", Length="2 mm", Mount="Surface Mount", Mounting Technology="Surface Mount", PackageDescription="2-Pin Surface Mounted Device, Body 2 x 1.25 mm", PackageReference=0805, Packaging="Tape and Reel", Pins=2, REACH SVHC="No SVHC", RoHSCompliant=true
RV1 RV2: library part CMP-0584-00001-2, "ESD Protector, 5 V Supply, -40 to 85 degC, 1.6 x 0.8 x 0.55 mm SMD, RoHS, Tape and Reel", Manufacturer=Bourns, Operating Temperature="-40 to 85 degC", CO="0.5 pF", ComponentLink1Description="Manufacturer URL", ComponentLink1URL=http://www.bourns.com/, ComponentLink2Description=Datasheet, ComponentLink2URL=http://www.bourns.com/data/global/pdfs/MLC.pdf, DatasheetVersion="Rev. S", Mounting Technology="Surface Mount", PackageDescription="2-Pin SMD, Body 1.6 x 0.8 mm, Pitch 1.52 mm", PackageReference=CG0603-2, Packing="Tape and Reel", PartNumber=CG0603MLC-05E, RoHS=TRUE, RT="1 ns", VC="20 V", VDC="5 V", VT="150 V"
SW1 SW2: library part CMP-1684-00021-1, "Tact Switch, SPST-NO, 0.05 A, -35 to 85 degC, 4-Pin THD, RoHS, Bulk", Actuator Color=Black, Contact Rating @ Voltage=0.05A@24VDC, Dielectric Strength=500VAC, Manufacturer="TE Connectivity", Maximum AC Voltage Rating=N/A, Maximum Contact Resistance=100mOhm, Maximum DC Voltage Rating=24V, Minimum Insulation Resistance=100MOhm, Operating Temperature=-35to85C, Package Description="4-Pin Through Hole Device, Body 5.99 x 5.99 mm, Pitch 6.5 mm", Package Reference=THD, Actuator Length=1.4mm, Actuator Material=PolybutyleneTerephthalate, Actuator Style=RoundButton, Base Material=N/A, Body Orientation=Straight, Bushing Type=Unthreaded, Contact Material=CopperAlloy, Contact Plating=Silver, Datasheet URL=http://www.te.com/commerce/DocumentDelivery/DDEController?Action=showdoc&DocId=Customer+Drawing%7F1825910%7FC9%7Fpdf%7FEnglish%7FENG_CD_1825910_C9.pdf%7F1825910-6, Datasheet Version="Rev. C9", Dimension=5.99x5mm, Electrical Life=100000Cycles, Family=1825910, Function=MomentaryContact, Housing Material=N/A, Illumination=N/R, Manufacturer URL=http://www.te.com, Mechanical Life=100000Cycles, Mounting=ThroughHole, Packaging=N/A, Part No=1825910-6, Pole Throw Configuration=SPST, Product Weight=N/A, RoHS=Yes, Seal Description=N/A, Seal Location=N/A, Switch Configuration=OFF(ON), Terminal Type=PCPins, Thread Size=N/R
U1: library part CMP-0095-00303-3, "8-bit AVR Microcontroller, 2.7-5.5V, 16KB Flash, 512 Bytes EEPROM, 512 Bytes SRAM, 32-pin TQFP, Industrial Grade (-40°C to 85°C)", Code_JEDEC=MS-026-ABA, ComponentLink1Description="Manufacturer URL", ComponentLink1URL=http://www.atmel.com/, ComponentLink2Description="ATmega8U2/16U2/32U2 Datasheet", ComponentLink2URL=http://www.atmel.com/dyn/resources/prod_documents/doc7799.pdf, ComponentLink3Description="ATmega8U2/16U2/32U2 Summary", ComponentLink3URL=http://www.atmel.com/dyn/resources/prod_documents/7799S.pdf, DatasheetVersion="revD, Nov-2010", PackageDescription="32-Lead, 7x7x1.0 mm Body, 0.8mm Lead Pitch, Thin Profile Plastic Quad Flat Package (TQFP)", PackageReference=32A, PackageVersion="revC, Oct-2010", PartNumber=ATmega16U2-AU, RevisionNote="Schematic symbol corrected"
U2: library part CMP-0095-00013-2, "8-bit AVR Microcontroller, 32KB Flash, 1KB EEPROM, 2KB SRAM, 28-pin PDIP, Industrial Grade (-40°C to 85°C)", ComponentLink1Description="Manufacturer URL", ComponentLink1URL=http://www.atmel.com/, ComponentLink2Description="ATmega48A/48PA/88A/88PA/168A/168PA/328/328P Datasheet", ComponentLink2URL=http://www.atmel.com/dyn/resources/prod_documents/8271.pdf, ComponentLink3Description="ATmega48A/48PA/88A/88PA/168A/168PA/328/328P Summary", ComponentLink3URL=http://www.atmel.com/dyn/resources/prod_documents/8271S.pdf, DatasheetVersion="revD, May-2011", PackageDescription="28-lead (0.300\"/7.62mm Wide) Plastic Dual Inline Package (PDIP)", PackageReference=28P3, PackageVersion="revB, Sep-2001", RevisionNote="DatasheetVersion updated. URLs added."
U3: library part CMP-0395-00346-2, "Single Output Low Noise LDO, 1.5 A, Fixed 3.3 V Output, 2.1 to 20 V Input, 6-pin SOT-223 (DCQ), -40 to 125 degC, Green (RoHS & no Sb/Br)", Manufacturer="Texas Instruments", Accuracy(%)=3, ComponentLink1Description="Manufacturer URL", ComponentLink1URL=http://www.ti.com/, ComponentLink2Description=Datasheet, ComponentLink2URL=http://www.ti.com/general/docs/lit/getliterature.tsp?genericPartNumber=TL1963A-33&fileType=pdf, ComponentLink3Description="Package Specification", ComponentLink3URL=http://www.ti.com/litv/pdf/mpds098c, DatasheetVersion=SLVS719F, Eco-Plan="Green (RoHS & no Sb/Br)", Fixed Output Options(V)=3.3, Iout(Max)(A)=1.5, Iq(Typ)(mA)=1, Mounting Technology="Surface Mount", PackageDescription="6-Pin Plastic Small Outline, Body 3.5 x 6.5 mm, Pitch 1.27 mm", PackageReference=DCQ0006A, PackageVersion=4202109/D, PartNumber=TL1963A-33DCQR, SubFamily="Single Channel LDO", Vdo(Typ)(mV)=340, Vin(Max)(V)=20, Vin(Min)(V)=2.1, Vout Adj(Max)(V)=3.3, Vout Adj(Min)(V)=3.3
U4 U5 U6 U7: library part CMP-0859-00040-4, "IC GATE AND 1CH 2-INP SOT23-5", Ambient Temperature Range High=+125°C, Ambient Temperature Range Low=-55°C, Manufacturer="Texas Instruments", Max Junction Temp=+150°C, Max Supply Voltage=5.5V, Min Supply Voltage=2V, Nominal Supply Current=1uA, Package=DBV0005A, Temperature="-55°C to +125°C", Automotive=No, Category=IC, ComponentLink2Description=Datasheet, ComponentLink2URL=http://www.ti.com/lit/ds/symlink/sn74ahc1g09.pdf, Device Class L1="Integrated Circuits (ICs)", Device Class L2="Logic ICs", Device Class L3="Logic Gates", Digikey Description="IC GATE AND 1CH 2-INP SOT23-5", Height=1.45mm, Ipc Land Pattern Name=SOT95P280X145-5, Lead Free=Yes, Logic Function Desc=AND, Manufacturer Part Number=SN74AHC1G09DBVR, Mouser Description="IC GATE AND 1CH 2-INP SOT-23-5", Number Of Circuits=1, Number Of Inputs=2, Number Of Outputs=1, Octopart=https://octopart.com/sn74ahc1g09dbvr-texas+instruments-20351419, Propagation Delay=4.6ns, RoHS=TRUE, Standoff Height=0mm, Temperature Range High=+125°C, Temperature Range Low=-55°C
Y1 Y2: library part CMP-27762-000095-1, "Crystal 16MHz ±20ppm 18pF SMD-2 6mm x 3.5mm", Case/Package=CSMD, ESR (Equivalent Series Resistance)=50R, Frequency=16MHz, Frequency Stability=30ppm, Frequency Tolerance=20ppm, Load Capacitance=18pF, Max Operating Temperature=85°C, Min Operating Temperature=-40°C, Operating Frequency="16 MHz", Package Quantity=1000, Resistor Type=Ceramic, Depth=3.5mm, Height=0.055inch, Lead Free="Lead Free", Length=6mm, Mount="Surface Mount", Number of Pins=2, Packaging="Tape and Reel", Radiation Hardening=No, Series=ABM7, Termination=SMD/SMT, Tolerance=20ppm, Width=3.3mm

## Via types
v1: diameter 0.6, hole 0.3, Top Layer to Bottom Layer, 67 vias

## Nets (pads, with @x,y where several pads share a name; then routed paths per layer and width w, separated by ;. In a path a pad name is that pad's centre, name@x,y a point inside that pad or via, vN(x,y) a via of type N, cw(c..) or ccw(c..) an arc to the next point about the centre after c; other vN are vias at no path point)
16U2_BUF_RESETn: C33.2 R23.2 U7.1 U7.2 | length 9.7
  Top Layer w0.2: R23.2 64.958,77.372 65.333,76.997 66.507,76.997 66.826,76.678 U7.1 U7.2 68.199,75.221 68.835,74.585 71.571,74.585 71.688,74.468 71.688,74.429 71.863,74.254 C33.2
16U2_HDR_RESETn: J3.5 J4.3 | length 6.7
  Top Layer w0.2: J3.5 74.676,90.424 J4.3
16U2_MISO: J3.1 U1.17 | length 10.8
  Top Layer w0.2: J3.1 67.491,87.576 68.256,87.576 71.371,84.461 U1.17
16U2_MOSI: J3.4 U1.16 | length 12
  Top Layer w0.2: J3.4 67.435,92.712 67.435,91.839 68.362,90.912 68.362,90.118 70.05,88.43 71.173,88.43 71.501,88.102 71.501,86.65 72.24,85.911 U1.16
16U2_PB4: J4.2 J5.1 U1.18 | length 22.7
  Top Layer w0.2: J5.1 68.374,86.36 71.073,83.661 U1.18 v1(76.867,83.661)
  Bottom Layer w0.2: J4.2 76.238,93.942 76.238,93.123 77.162,92.198 77.162,91.19 77.13,91.157 77.162,91.124 77.162,84.065 76.867,83.769 v1(76.867,83.661)
16U2_PB5: J5.3 U1.19 | length 10.4
  Top Layer w0.2: J5.3 65.332,85.036 68.761,85.036 70.936,82.861 U1.19
16U2_PB6: J5.2 U1.20 | length 7.1
  Top Layer w0.2: J5.2 69.215,83.82 70.628,82.407 71.83,82.407 72.176,82.061 U1.20
16U2_PB7: J5.4 U1.21 | length 10
  Top Layer w0.2: J5.4 65.303,82.525 69.657,82.525 70.521,81.661 71.808,81.661 71.962,81.507 71.974,81.507 72.22,81.261 U1.21
16U2_RESETn: J4.4 R24.1 U1.24 U7.4 | length 17.6
  Top Layer w0.2: U7.4 69.149,79.079 69.349,78.879 69.801,78.879 71.199,77.481 R24.1 71.549,77.481 71.949,77.881 71.949,78.056 72.254,78.361 72.254,78.769 72.346,78.861 U1.24 73.741,78.861 75.438,80.558 v1(75.438,81.333)
  Bottom Layer w0.2: v1(75.438,81.333) 75.438,84.876 75.946,85.384 J4.4
16U2_RX_LED: LED1.1 U1.10 | length 8.6
  Top Layer w0.2: U1.10 79.216,86.686 84.168,91.638 84.588,91.638 84.773,91.823 LED1.1
16U2_RXD: R10.2 U1.8 | length 55.9
  Top Layer w0.2: U1.8 81.466,86.165 v1(84.328,89.027) ; v1(124.333,98.425) 126.127,98.425 R10.2
  Bottom Layer w0.2: v1(84.328,89.027) 122.174,89.027 124.333,91.186 v1(124.333,98.425)
16U2_SCLK: J3.3 R8.2 | length 4.8
  Top Layer w0.2: J3.3 69.631,87.976 70.176,87.976 70.551,87.601 R8.2
16U2_SCLK_R: R8.1 U1.15 | length 3.8
  Top Layer w0.2: R8.1 72.587,87.24 74.662,87.24 75.216,86.686 U1.15
16U2_TX_LED: LED2.1 U1.11 | length 10.2
  Top Layer w0.2: U1.11 78.418,85.913 78.418,86.992 84.773,93.347 LED2.1
16U2_TXD: R9.2 U1.9 | length 57.2
  Top Layer w0.2: U1.9 80.016,86.586 84.031,90.601 84.251,90.601 v1(84.328,90.678) ; v1(124.333,100.584) 126.127,100.584 R9.2
  Bottom Layer w0.2: v1(84.328,90.678) 121.92,90.678 122.682,91.44 122.682,98.933 v1(124.333,100.584)
16U2PROG_328P_RESETn: J2.2 R1.1 U1.13 | length 69.1
  Top Layer w0.2: U1.13 76.816,88.05 78.59,89.824 78.59,91.096 78.894,91.4 79.348,91.4 80.518,90.23 v1(80.518,90.17)
  Top Layer w0.254: J2.2@135.445,97.727 J2.2
  Bottom Layer w0.254: v1(80.518,90.17) 83.312,87.376 122.301,87.376 132.588,97.663 135.382,97.663 J2.2
328P_16MHZ_XTAL1: C27.1 R13.1 U2.9 Y2.1 | length 9.4
  Top Layer w0.2: U2.9 106.426,69.94 105.979,70.387 R13.1 105.979,72.11 107.306,73.437 Y2.1 107.306,76.511 107.684,76.889 C27.1
328P_16MHZ_XTAL2: C26.1 R13.2 U2.10 Y2.2 | length 9.2
  Top Layer w0.2: C26.1 102.628,72.288 104.079,70.837 R13.2 103.886,70.419 U2.10
328P_AUTORESETn: C10.2 R16.1 U5.1 | length 18.8
  Top Layer w0.2: C10.2 134.508,98.847 134.668,99.006 136.013,99.006 136.725,98.294 136.725,92.206 135.991,91.472 135.446,91.472 134.12,90.146 134.12,88.284 R16.1 133.72,87.709 133.193,87.182 U5.1
328P_BUF_RESETn: C31.2 R21.2 U5.2 | length 5.1
  Top Layer w0.2: R21.2 129.057,86.446 C31.2 131.337,86.446 132.019,85.764 132.019,85.639 132.622,85.036 132.993,85.036 U5.2
328P_RESETn: J4.1 J6.3 J12.5 R11.1 U2.1 U5.4 | length 153.8
  Top Layer w0.2: J12.5 71.882,96.774 J4.1 ; R11.1 111.663,76.689 111.663,76.031 112.942,74.752 112.942,67.017 v1(116.586,63.373) 121.539,63.373 U2.1 ; v1(126.746,83.947) U2.1 ; U5.4 135.793,82.707 133.307,80.221 133.307,70.616 131.271,68.58 U2.1
  Bottom Layer w0.2: J4.1 76.172,96.548 76.172,95.729 79.248,92.652 79.248,89.916 83.185,85.979 125.603,85.979 126.746,84.836 v1(126.746,83.947) ; J6.3 102.443,49.449 103.422,49.449 103.429,49.442 104.343,49.442 105.322,50.421 105.322,51.003 110.238,55.919 110.566,55.919 115.15,60.503 115.15,61.937 v1(116.586,63.373)
+3V3: C16.2 C22.2 J6.4 U3.4 U3.5 | length 30.9
  Top Layer w0.4: U3.4 U3.5 81.002,57.654 81.744,56.912 C22.2 v1(82.169,55.753) ; J6.4 103.886,52.544 103.961,52.619 C16.2
  Bottom Layer w0.4: v1(82.169,55.753) 86.487,51.435 95.013,51.435 95.328,51.75 102.682,51.75 J6.4
+3V3_16U2_UCAP: C9.1 U1.27 | length 4.5
  Top Layer w0.4: C9.1 74.701,74.784 76.016,76.099 U1.27
+5: C8.2 U1.31 | length 3
  Top Layer w0.4: C8.2@79.216,74.456 U1.31
+5V: C6.2 C14.2 C21.2 J6.5 L1.1 U3.1 U3.2 | length 54.1
  Top Layer w0.4: L1.1 64.395,55.109 C6.2 68.961,55.709 69.561,56.309 72.285,56.309 73.63,57.654 ; C21.2 73.152,58.132 73.63,57.654 ; v1(76.581,55.88) 76.581,56.78 76.554,56.807 76.554,57.554 U3.2 U3.1 73.63,57.654 ; J6.5 106.566,50.686 106.566,51.896 107.356,52.686 C14.2
  Bottom Layer w0.4: v1(76.581,55.88) 81.915,50.546 89.349,50.546 91,48.895 103.192,48.895 103.199,48.888 104.573,48.888 104.58,48.895 104.775,48.895 J6.5
+5V/3V3: C11.2 C15.2 C17.2 C24.2 C25.2 C28.2 C29.2 C30.2 D2.1 D3.1 FB1.1 FB2.1 FB3.1 J3.2 J6.2 J12.2 R1.2 R3.2 R4.2 R11.2 R14.2 R15.2 R16.2 R17.2 R18.2 R19.2 R24.2 U4.5 U5.5 U6.5 U7.5 | length 208.3
  Top Layer w0.254: 69.977,94.742 70.665,94.054 70.739,93.98 74.295,93.98 75.285,92.99 77.836,92.99 77.862,93.016
  Top Layer w0.4: C24.2 63.287,102.829 J12.2 63.364,100.194 63.364,97.92 63.414,97.87 C11.2 63.414,94.193 J3.2 ; 69.977,94.742 66.421,94.742 J3.2 ; v1(73.66,75.692) 73.655,75.687 71.379,75.687 R24.2 71.199,75.681 70.245,76.635 70.245,77.044 69.303,77.986 68.291,77.986 67.249,79.028 U7.5 67.249,79.528 67.149,79.628 66.966,79.628 66.716,79.878 C30.2 66.716,81.216 66.641,81.291 R19.2 65.043,81.398 63.1,81.398 D3.1 62.992,82.974 62.692,83.275 62.692,91.013 J3.2 ; 77.862,93.016 78.69,93.009 R1.2 ; R1.2@79.348,93.004 79.552,93.208 79.552,95.331 80.179,95.958 80.179,96.97 80.933,97.724 U4.5 81.433,97.724 82.583,96.574 82.583,96.427 82.658,96.352 C25.2 84.451,96.352 84.902,96.803 R14.2 84.902,97.253 85.831,98.182 87.465,98.182 89.977,95.67 R4.2 R3.2 ; FB1.1 85.682,76.254 85.682,75.862 87.122,74.422 v1(88.011,74.422) 88.011,71.374 85.46,68.823 R18.2 C29.2 83.906,63.862 83.981,63.787 84.143,63.787 84.739,63.191 U6.5 84.989,62.291 85.46,61.82 85.46,61.628 85.768,61.32 90.233,61.32 94.13,57.423 98.595,57.423 98.795,57.223 FB3.1 98.801,57.017 98.801,50.551 J6.2 ; v1(105.283,82.931) 105.872,82.931 106.106,82.697 R15.2 R15.2@106.233,81.28 ; R15.2@106.106,81.182 109.163,78.125 109.163,77.389 R11.2 109.399,77.025 109.399,75.12 FB2.1 ; R15.2@106.293,81.22 R15.2@106.233,81.28 ; v1(113.03,81.28) R15.2@106.233,81.28 ; v1(128.016,76.327) 128.054,76.365 128.113,76.365 131.075,79.327 R17.2 131.075,81.6 131.29,81.815 D2.1 132.684,81.915 134.197,83.428 134.197,84.44 135.543,85.786 U5.5 135.793,89.064 135.341,89.516 C28.2
  Bottom Layer w0.4: v1(73.66,75.692) 73.714,75.692 73.968,75.438 86.995,75.438 v1(88.011,74.422) 91.694,74.422 93.218,75.946 93.218,81.661 94.488,82.931 v1(105.283,82.931) ; v1(113.03,81.28) 123.063,81.28 v1(128.016,76.327)
+5V/3V3_16U2: C2.2 C3.2 C4.2 FB1.2 U1.4 U1.32 | length 17.1
  Top Layer w0.4: U1.4 79.166,81.261 78.678,80.773 78.678,80.149 80.016,78.811 U1.32 80.016,75.836 80.932,74.92 80.932,74.456 81.007,74.381 C3.2 81.419,74.394 C4.2@84.792,74.394 ; FB1.2 83.682,76.254 84.682,75.254 84.682,74.516 84.792,74.406 C4.2
+5V/3V3_328P_AVCC: C18.2 C19.2 FB3.2 U2.20 | length 12.7
  Top Layer w0.4: FB3.2 106.426,57.023 ; U2.20 106.426,57.023 ; C18.2 107.343,55.003 107.343,56.884 C19.2 107.331,56.913 107.221,57.023 106.426,57.023
+5V/3V3_328P_VCC: C12.2 C13.2 FB2.2 U2.7 | length 6.6
  Top Layer w0.4: FB2.2 111.136,74.857 111.506,74.487 U2.7
+5V_USB: C7.2 J1.1 L1.2 | length 21.8
  Top Layer w0.4: L1.2 68.701,58.169 C7.2 68.961,59.029 67.707,60.283 67.707,64.317 69.222,65.832 69.222,68.019 68.91,68.331 67.476,68.331 67.164,68.643 67.164,71.219 67.43,71.485 68.247,71.485 J1.1
+AREF: C20.2 C23.2 J10.8 U2.21 | length 50.9
  Top Layer w0.4: C23.2@104.124,101.219 104.124,101.644 104.394,101.914 J10.8 ; C20.2 107.356,59.201 108.966,60.811 U2.21 v1(108.966,65.913) ; v1(109.855,96.393) 109.855,96.339 110.109,96.085 v1(110.109,84.582)
  Bottom Layer w0.4: J10.8 104.394,101.854 v1(109.855,96.393) ; v1(108.966,65.913) 110.17,67.117 110.17,84.38 110.147,84.402 110.147,84.544 v1(110.109,84.582)
AD0: J7.1 U2.23 | length 11.9
  Top Layer w0.2: U2.23 114.046,54.229 J7.1
AD1: J7.2 U2.24 | length 11.9
  Top Layer w0.2: U2.24 116.586,54.229 J7.2
AD2: J7.3 U2.25 | length 11.9
  Top Layer w0.2: U2.25 119.126,54.229 J7.3
AD3: J7.4 U2.26 | length 11.9
  Top Layer w0.2: U2.26 121.666,54.229 J7.4
AD4/SDA: J7.5 J10.9 U2.27 | length 64.6
  Top Layer w0.2: v1(117.856,76.835) v1(117.856,96.393) ; U2.27 124.206,54.229 J7.5
  Bottom Layer w0.2: J10.9 106.934,102.489 113.03,96.393 v1(117.856,96.393) ; v1(117.856,76.835) 117.856,67.31 U2.27
AD5/SCL: J7.6 J10.10 U2.28 | length 64.5
  Top Layer w0.2: v1(120.396,76.835) v1(120.396,96.393) ; U2.28 126.746,54.229 J7.6
  Bottom Layer w0.2: J10.10 109.541,103.565 109.541,102.549 114.427,97.663 119.126,97.663 v1(120.396,96.393) ; v1(120.396,76.835) 120.396,67.31 U2.28
CON_USB_N: J1.2 R5.1 RV1.1 | length 9.9
  Top Layer w0.2: J1.2 69.866,70.881 70.739,71.754 RV1.1 70.957,71.666 73.967,71.666 74.174,71.459 74.174,69.507 73.345,68.678 R5.1
CON_USB_P: J1.3 R7.1 RV2.1 | length 6.3
  Top Layer w0.2: J1.3 70.74,70.231 RV2.1@71.755,69.216 ; RV2.1 RV2.1@71.755,69.216 ; R7.1 73.345,70.387 72.97,70.012 72.745,70.012 72.229,69.496 72.035,69.496 RV2.1@71.755,69.216
GND: C1.2 C2.1 C3.1 C4.1 C5.2 C6.1 C7.1 C8.1 C9.2 C11.1 C12.1 C13.1 C14.1 C15.1 C16.1 C17.1 C18.1 C19.1 C20.1 C21.1 C22.1 C23.1 C24.1 C25.1 C26.2 C27.2 C28.1 C29.1 C30.1 C31.1 C32.1 C33.1 D1.1 J1.4 J1.5 J1.MH1 J1.MH2 J1.MP1 J1.MP2 J1.MP3 J1.MP4 J3.6 J6.6 J6.7 J10.7 R6.2 RV1.2 RV2.2 SW1.3 SW1.4 SW2.3 SW2.4 U1.3 U1.28 U2.8 U2.22 U3.3 U3.6 U4.3 U5.3 U6.3 U7.3 | length 127.4
  Top Layer w0.254: J1.5 68.293,69.256 ; J1.4 68.293,69.256 ; v1(69.936,69.256) 68.293,69.256
  Top Layer w0.4: v1(63.684,71.431) J1.MP3 ; C24.1 v1(66.421,104.267) ; C11.1 v1(66.675,96.012) ; J1.MP2 67.968,66.931 J1.MH2 J1.MP4 J1.MP3 ; C30.1 v1(70.104,81.153) ; C6.1 v1(70.494,50.809) ; C7.1 68.961,62.129 70.092,60.998 70.692,60.998 v1(70.73,60.96) ; v1(69.149,75.239) U7.3 ; J3.6 v1(71.882,92.964) ; RV1.2@70.739,73.274 70.919,73.094 71.073,73.094 71.863,72.304 C33.1 ; RV1.2 70.675,73.468 65.681,73.468 J1.MH1 J1.MP3 ; v1(71.755,66.167) RV2.2 ; C21.1 v1(73.152,62.738) ; C9.2 76.429,75.117 76.816,75.504 U1.28 v1(76.816,79.61) ; U3.3 v1(77.724,59.69) ; U3.6 v1(77.724,65.151) ; v1@78.583,94.264 v1(78.583,94.266) U4.3 ; v1(79.432,80.461) U1.3 ; C8.1 79.514,72.419 85.204,72.419 C4.1 85.217,71.301 85.344,71.174 v1(85.344,71.12) ; C29.1 v1(81.956,65.827) ; U6.3 82.139,58.942 82.564,58.942 82.704,58.802 82.704,58.702 82.986,58.42 C32.1 83.861,56.629 84.364,56.126 SW2.3 v1(84.364,51.653) SW2.4 ; v1(83.058,93.218) C25.1 ; v1(88.011,80.772) 90.805,80.772 ; C1.2 90.805,80.772 ; C5.2 90.805,80.772 ; C17.1 v1(101.854,53.086) ; C15.1 v1(101.727,54.991) ; v1(100.711,101.092) C23.1 102.124,101.517 101.854,101.787 J10.7 ; C16.1 v1(104.013,55.626) ; C26.2 105.156,77.089 ; v1(105.156,74.676) 105.156,77.089 ; D1.1 105.652,77.821 106.184,77.289 C27.2 105.156,77.089 ; v1(107.696,69.85) U2.8 109.126,68.74 109.126,72.915 C13.1 ; J6.7 J6.6 108.966,52.346 109.306,52.686 C14.1 C18.1 109.306,58.76 U2.22 v1(111.506,58.801) ; v1(130.937,83.185) C31.1 131.337,84.496 131.947,83.886 U5.3 U5.3@132.943,83.886 ; v1(132.207,89.916) C28.1 133.391,91.667 132.713,92.345 R6.2 ; SW1.3 v1(135.6,73.751) SW1.4
IO0: J8.1 R9.1 U2.2 | length 39.4
  Top Layer w0.2: U2.2 124.206,91.186 130.175,97.155 130.175,98.665 128.254,100.586 128.254,100.836 130.273,102.855 130.414,102.855 J8.1
IO1: J8.2 R10.1 U2.3 | length 38.6
  Top Layer w0.2: U2.3 121.666,91.585 128.254,98.173 R10.1 127.754,98.798 127.754,99.385 127.3,99.839 127.3,102.281 J8.2
IO2: J8.3 U2.4 | length 37.8
  Top Layer w0.2: U2.4 119.126,96.647 J8.3
IO3: J8.4 U2.5 | length 37.8
  Top Layer w0.2: U2.5 116.586,96.647 J8.4
IO4: J8.5 U2.6 | length 37.8
  Top Layer w0.2: U2.6 114.046,96.647 J8.5
IO5: J8.6 U2.11 | length 47.8
  Top Layer w0.2: U2.11 101.346,96.429 102.072,97.155 112.014,97.155 J8.6
IO6: J8.7 U2.12 | length 47.8
  Top Layer w0.2: U2.12 98.806,96.393 100.584,98.171 110.49,98.171 J8.7
IO7: J8.8 U2.13 | length 48
  Top Layer w0.2: U2.13 96.266,96.774 98.742,99.251 109.029,99.251 J8.8
IO8: J10.1 R20.1 U2.14 | length 51.1
  Top Layer w0.2: R20.1 86.614,63.232 86.406,63.44 86.406,67.483 87.503,68.58 U2.14 93.726,95.758 v1(90.805,98.679)
  Bottom Layer w0.2: J10.1 87.414,102.832 87.414,102.07 v1(90.805,98.679)
IO9: J10.2 U2.15 | length 53.4
  Top Layer w0.2: v1(89.154,98.679) 92.583,95.25 v1(92.583,69.977)
  Bottom Layer w0.2: v1(89.154,98.679) 89.077,98.756 88.823,98.756 84.669,102.91 84.669,104.735 85.471,105.537 87.507,105.537 89.154,103.89 J10.2 ; v1(92.583,69.977) 92.583,67.945 93.726,66.802 U2.15
MISO: J10.5 J12.1 U2.18 | length 78.6
  Top Layer w0.2: J12.1 65.913,100.203 70.485,100.203 71.755,101.473 94.615,101.473 J10.5 ; v1(100.203,95.885) v1(100.203,62.103) U2.18
  Bottom Layer w0.2: J10.5 96.774,102.235 98.679,100.33 98.679,97.409 v1(100.203,95.885)
MOSI: J10.4 J12.4 U2.17 | length 72.8
  Top Layer w0.2: J12.4 68.453,102.743 79.54,102.743 79.905,102.378 92.98,102.378 J10.4 ; v1(97.536,95.885) 97.536,68.289 98.806,67.019 U2.17
  Bottom Layer w0.2: J10.4 94.234,103.251 97.536,99.949 v1(97.536,95.885)
NetC1_1: C1.1 R2.1 U1.1 Y1.1 | length 9.6
  Top Layer w0.2: U1.1 89.988,78.861 90.605,78.244 C1.1
NetC5_1: C5.1 R2.2 U1.2 Y1.2 | length 10.8
  Top Layer w0.2: U1.2 82.999,79.661 86.638,83.3 C5.1
NetC10_1: C10.1 J2.1 | length 3.1
  Top Layer w0.2: C10.1 135.042,100.797 J2.1
NetD1_2: D1.2 R15.1 | length 2.1
  Top Layer w0.2: D1.2 104.206,79.429 R15.1
NetD2_2: D2.2 R17.1 R21.1 SW1.1 SW1.2 | length 17.6
  Top Layer w0.2: v1(127.762,77.989) 127.839,78.066 128.014,78.066 129.275,79.327 R17.1 128.905,79.872 R21.1 ; SW1.1 SW1.2
  Bottom Layer w0.2: v1(127.762,77.989) 128.841,76.91 SW1.2
NetD3_2: D3.2 R19.1 R23.1 | length 4
  Top Layer w0.2: R23.1 62.992,77.663 D3.2 63.207,79.491 R19.1
NetJ2_3: J2.3 R6.1 | length 3.2
  Top Layer w0.2: R6.1@132.715,94.345 134.604,94.345 J2.3
NetLED1_2: LED1.2 R3.1 | length 2.2
  Top Layer w0.2: LED1.2 87.413,91.948 88.077,92.612 R3.1
NetLED2_2: LED2.2 R4.1 | length 2.4
  Top Layer w0.2: LED2.2 86.423,93.597 86.608,93.782 86.733,93.782 87.093,94.142 87.702,94.142 88.077,94.517 R4.1
NetLED3_1: LED3.1 U4.4 | length 3.9
  Top Layer w0.2: U4.4 81.433,95.824 82.134,95.123 LED3.1
NetLED3_2: LED3.2 R14.1 | length 2.1
  Top Layer w0.2: LED3.2 86.423,96.424 86.802,96.803 R14.1
NetR18_1: R18.1 R22.1 SW2.1 SW2.2 | length 16.1
  Top Layer w0.2: R18.1 87.26,64.087 88.913,62.434 89.088,62.434 v1(89.165,62.357) v1@89.165,62.241 ; SW2.2 89.088,49.552 89.088,60.132 v1(89.165,60.209)
  Bottom Layer w0.2: v1(89.165,60.209) v1(89.165,62.357)
NetR20_2: R20.2 U6.4 | length 1.9
  Top Layer w0.2: U6.4 R20.2
SCK: J10.6 J12.3 R12.2 U4.1 U4.2 | length 83.9
  Top Layer w0.2: J12.3 70.558,95.558 76.955,95.558 77.972,96.574 78.383,96.574 U4.2 U4.1 78.833,97.724 81.734,100.625 96.307,100.625 J10.6 ; R12.2 101.793,59.153 102.743,60.103 v1(102.743,65.913) ; v1(102.743,80.137) v1(102.743,91.948)
  Bottom Layer w0.2: J10.6 99.314,103.199 99.695,102.818 99.695,100.076 102.743,97.028 v1(102.743,91.948) ; v1(102.743,65.913) v1(102.743,80.137)
SCK_R: R12.1 U2.19 | length 2.1
  Top Layer w0.2: R12.1 103.886,59.121 U2.19
SS: J10.3 U2.16 | length 44.6
  Top Layer w0.2: v1(92.71,98.679) 94.83,96.559 94.83,68.455 96.266,67.019 U2.16
  Bottom Layer w0.2: J10.3 91.694,99.695 v1(92.71,98.679)
USB_N: R5.2 U1.30 | length 10.3
  Top Layer w0.2: R5.2 75.245,68.678 78.416,71.849 U1.30
USB_P: R7.2 U1.29 | length 8.1
  Top Layer w0.2: R7.2 75.245,70.837 75.62,71.212 76.214,71.212 77.616,72.614 U1.29
USER_BUTTON_BUF: C32.2 R22.2 U6.1 U6.2 | length 7.5
  Top Layer w0.2: U6.1 U6.2 82.389,61.341 82.685,61.045 82.806,61.045 83.439,60.412 83.439,60.37 84.814,58.995 85.636,58.995 85.811,58.82 C32.2 R22.2